# Allegro board ph.brd
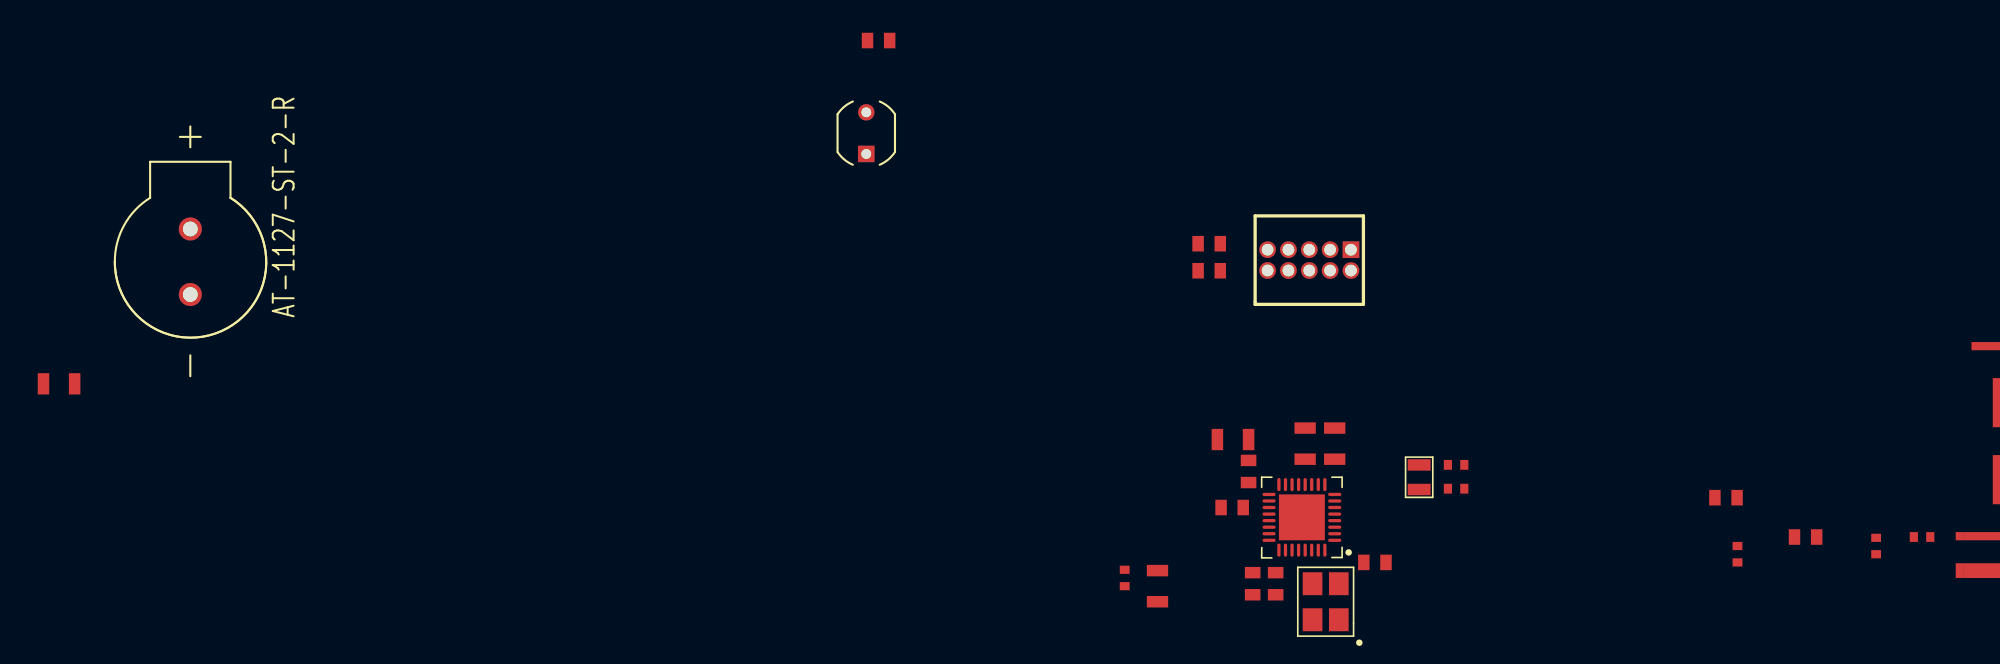
[diagram p0: board, top side]
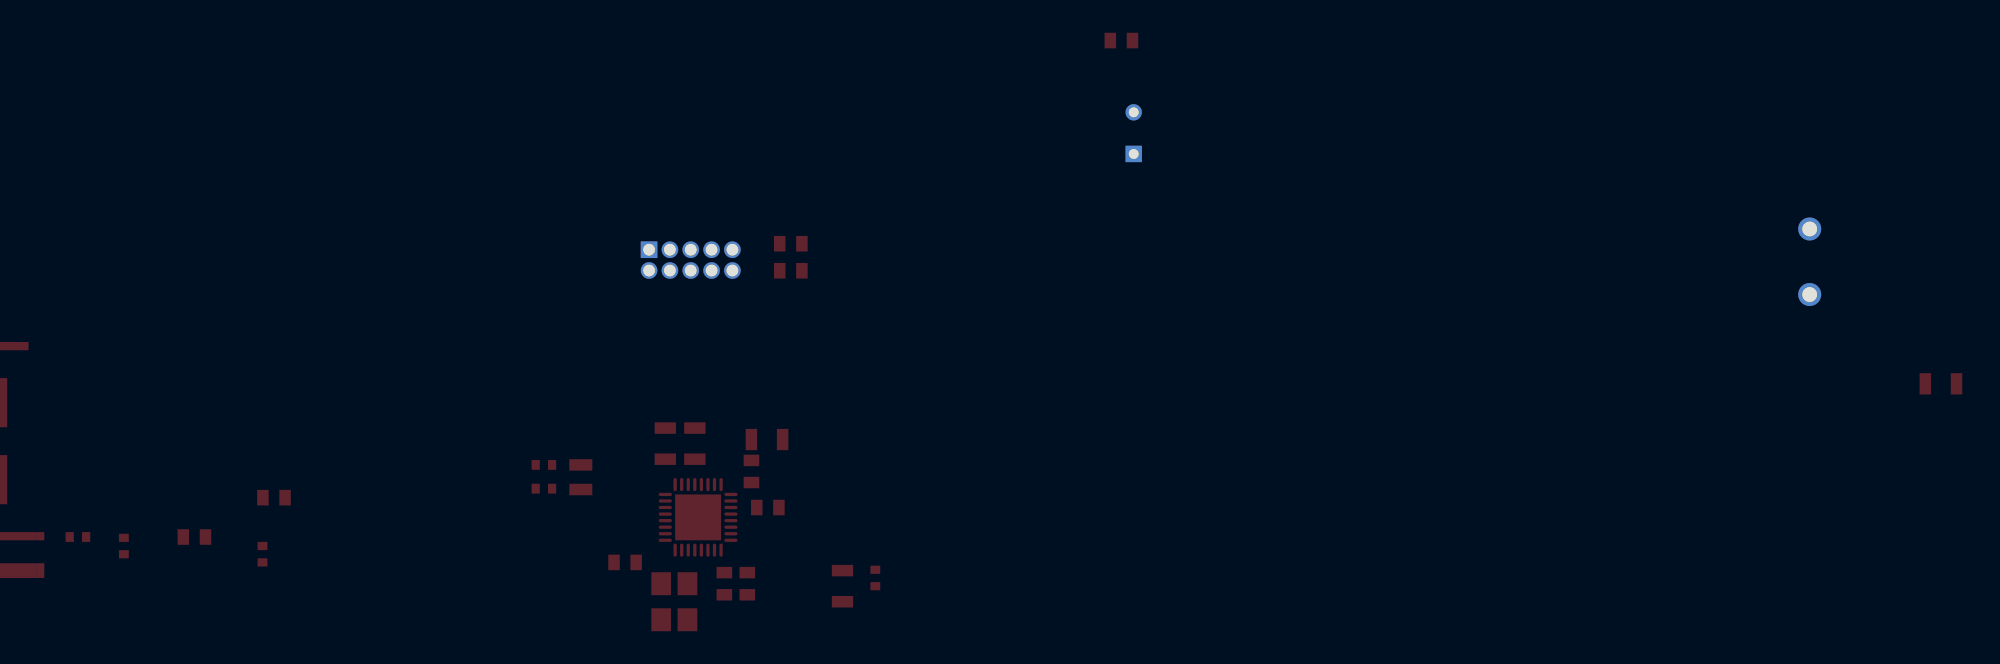
[diagram p1: board, bottom side, seen from below]

No outline. copper layers: TOP, BOTTOM. Coordinates in mm from the lowest, leftmost part position.

## Design rules (mm)
constraint set DEFAULT: min track width 0.127

## Placement (name value [footprint] x y rotation side)
A1  TI AN043  [AN043_PATCH_ANTENNA]  116.1 0.95 270 top
BUZ1  AT-1127-ST-2-R  [XDCR_AT-1127-ST-2-R]  8 20.75 90 top
C1  12p  [0402_C]  85.15 6.9 0 top
C2  12p  [0402_C]  85.15 8.35 0 top
C3  1uF  [0805_C]  75.95 9.65 270 top
C4  100uF  [0805_C]  77.75 9.65 90 top
C5  100nF  [0603_C]  71.5 5.75 180 top
C6  100nF  [0603_C]  72.75 1.1 270 top
C7  10uF  [0805_C]  66.95 0.95 270 top
C8  10uF  [0805_C]  71.55 9.9 180 top
C9  100nF  [0603_C]  74.15 1.1 270 top
C10  100nF  [0603_C]  80.2 2.4 0 top
C11  12pF  [0402_C]  113.55 3.95 0 top
C12  1.2pF  [0402_C]  102.3 2.9 270 top
C13  1.2pF  [0402_C]  110.75 3.4 270 top
C14  10uF  [0805_C]  0 13.3 0 top
C15  100nF  [0603_C]  70.1 20.2 180 top
CYS1  24MHz  [TSX-3225_XTAL]  77.2 0 90 top
CYS2  32.768MHz  [SC-20S_XTAL]  82.9 7.6 90 top
J1  SAMTEC FTSH-105-01-L-D-K  [SAMTEC_FTSH-105-01-L-D-K]  76.2 20.85 180 top
L1  10uH  [0603_L]  72.5 7.95 90 top
L2  FerriteBead  [0402_L]  64.95 1.45 90 top
L3  15nH  [0603_L]  101.6 6.35 0 top
L4  2nH  [0603_L]  106.45 3.95 0 top
LS1  PDV-P8001  [XDCR_PDV-P9003-1]  49.2 28.6 90 top
M1  TI CC2640R2F RSM  [CC2640R2FRSM]  75.75 5.15 90 top
R1  2K  [0603_R]  49.95 34.25 0 top
R2  100K  [0603_R]  70.1 21.85 0 top

## Library data of the parts
A1 = ANTENNA
BUZ1 = AT-1127-ST-2-R
C1-C15 = CAP
CYS1 = CRYSTAL_24M
CYS2 = CRYSTAL_32768
J1 = SAMTEC FTSH-105-01-L-D-K
L1 L3 L4 = IND
L2 = FerriteBead
LS1 = PDV-P8001
M1 = CC2640
R1 R2 = RES

## Footprints (pads in the part's own frame, mm; a bottom-side part is the same pattern mirrored in y, then rotated)
0402_C
  rect 0.5x0.6 smd: 1(-0.5,0) 2(0.5,0)
0402_L
  rect 0.5x0.6 smd: 1(-0.5,0) 2(0.5,0)
0603_C
  rect 0.7x0.95 smd: 1(-0.675,0) 2(0.675,0)
0603_L
  rect 0.7x0.95 smd: 1(-0.675,0) 2(0.675,0)
0603_R
  rect 0.7x0.95 smd: 1(-0.675,0) 2(0.675,0)
0805_C
  rect 0.7x1.3 smd: 1(-0.95,0) 2(0.95,0)
AN043_PATCH_ANTENNA
  rect 0.9x0.5 smd: 1(-0.95,-0.25)
  rect 0.5x0.5 smd: 2(-3.05,-0.25)
CC2640R2FRSM
  rrect 0.2x0.8 smd: 1(-1.4,-2) 2(-1,-2) 3(-0.6,-2) 4(-0.2,-2) 5(0.2,-2) 6(0.6,-2) 7(1,-2) 8(1.4,-2) 24(-1.4,2)
  rrect 0.8x0.2 smd: 9(2,-1.4) 10(2,-1) 11(2,-0.6) 12(2,-0.2) 13(2,0.2) 14(2,0.6) 15(2,1) 16(2,1.4) 25(-2,1.4) 26(-2,1) 27(-2,0.6) 28(-2,0.2) 29(-2,-0.2) 30(-2,-0.6) 31(-2,-1) 32(-2,-1.4)
  rrect 0.2x0.8 smd rot 0.2: 17(1.4,2) 18(1,2) 19(0.6,2) 20(0.2,2) 21(-0.2,2) 22(-0.6,2) 23(-1,2)
  rect 2.8x2.8 smd: 33(0,0)
SAMTEC_FTSH-105-01-L-D-K
  rect 1.016x1.016 hole 0.711: 1(-2.54,-0.635)
  round 1.016 hole 0.711: 2(-2.54,0.635) 3(-1.27,-0.635) 4(-1.27,0.635) 5(0,-0.635) 6(0,0.635) 7(1.27,-0.635) 8(1.27,0.635) 9(2.54,-0.635) 10(2.54,0.635)
SC-20S_XTAL
  rect 0.7x1.4 smd: 1(-0.75,0) 2(0.75,0)
TSX-3225_XTAL
  rect 1.4x1.2 smd: 1(-1.1,-0.8) 2(1.1,-0.8) 3(1.1,0.8) 4(-1.1,0.8)
XDCR_AT-1127-ST-2-R
  round 1.408 hole 0.9: N(-2,0) P(2,0)
XDCR_PDV-P9003-1
  rect 1x1 hole 0.6: 1(-1.27,0)
  round 1 hole 0.6: 2(1.27,0)

## Nets
GND: A1.1(-) BUZ1.N C1.2(B) C2.2(B) C3.1 C4.2(B) C5.2(B) C6.2(B) C7.2(B) C8.2(B) C9.2(B) C10.2(B) C12.2(B) C13.2(B) C15.2(B) CYS1.2 CYS1.4 J1.3 J1.5 J1.9 M1.3 M1.7 M1.17 M1.20 M1.29 M1.33 R1.2(B)
GND_PS: LS1.2 R1.1
VCC: J1.1 L2.1
VDDR: C8.1 C9.1 C10.1 L1.2(B) M1.28 M1.32
VDDS: C4.1 C5.1 C6.1 C7.1 L2.2(B) M1.11 M1.19 M1.27 R2.1
ALRTN: M1.24
ANTENNA: A1.2 C11.2(B)
BUZ: C14.1 M1.10
BUZ_IN: BUZ1.P C14.2(B)
DCDC_SW: L1.1 M1.18
FILTER: C11.1 C13.1 L4.2(B)
LED: M1.8
PS: LS1.1(PS) M1.9
RESET: C15.1 J1.10 M1.21 R2.2(B)
RF_N: L3.1 M1.2
RF_P: C12.1 L3.2(B) L4.1 M1.1
SCL: M1.26
SDA: M1.25
TCKC: J1.4 M1.14
TDI: J1.8 M1.15
TDO: J1.6 M1.16
TMSC: J1.2 M1.13
X24M_N: CYS1.3 M1.30
X24M_P: CYS1.1 M1.31
X32K_Q1: C1.1 CYS2.1 M1.5
X32K_Q2: C2.1 CYS2.2(B) M1.6(X32K_Q2)
N172030: C3.2(B) M1.12

Pads without a net: J1 7; M1 4 22 23

## Copper pours and planes (outline as drawn; the poured copper is in the pictures)
Net_1 on TOP (solid shape): 121,13.15 118.36,13.15 118.36,11.15 121,11.15 121,8.45 118.36,8.45 118.36,6.45 121,6.45 121,1.45 116.1,1.45 116.1,2.35 120.5,2.35 120.5,3.75 116.1,3.75 116.1,4.25 120.5,4.25 120.5,5.95 117.86,5.95 117.86,8.95 120.5,8.95 120.5,10.65 117.86,10.65 117.86,13.65 120.5,13.65 120.5,15.35 116.56,15.35 116.56,15.85 121,15.85
